# EAGLE board signal_processing_module (EAGLE 9.6.2)
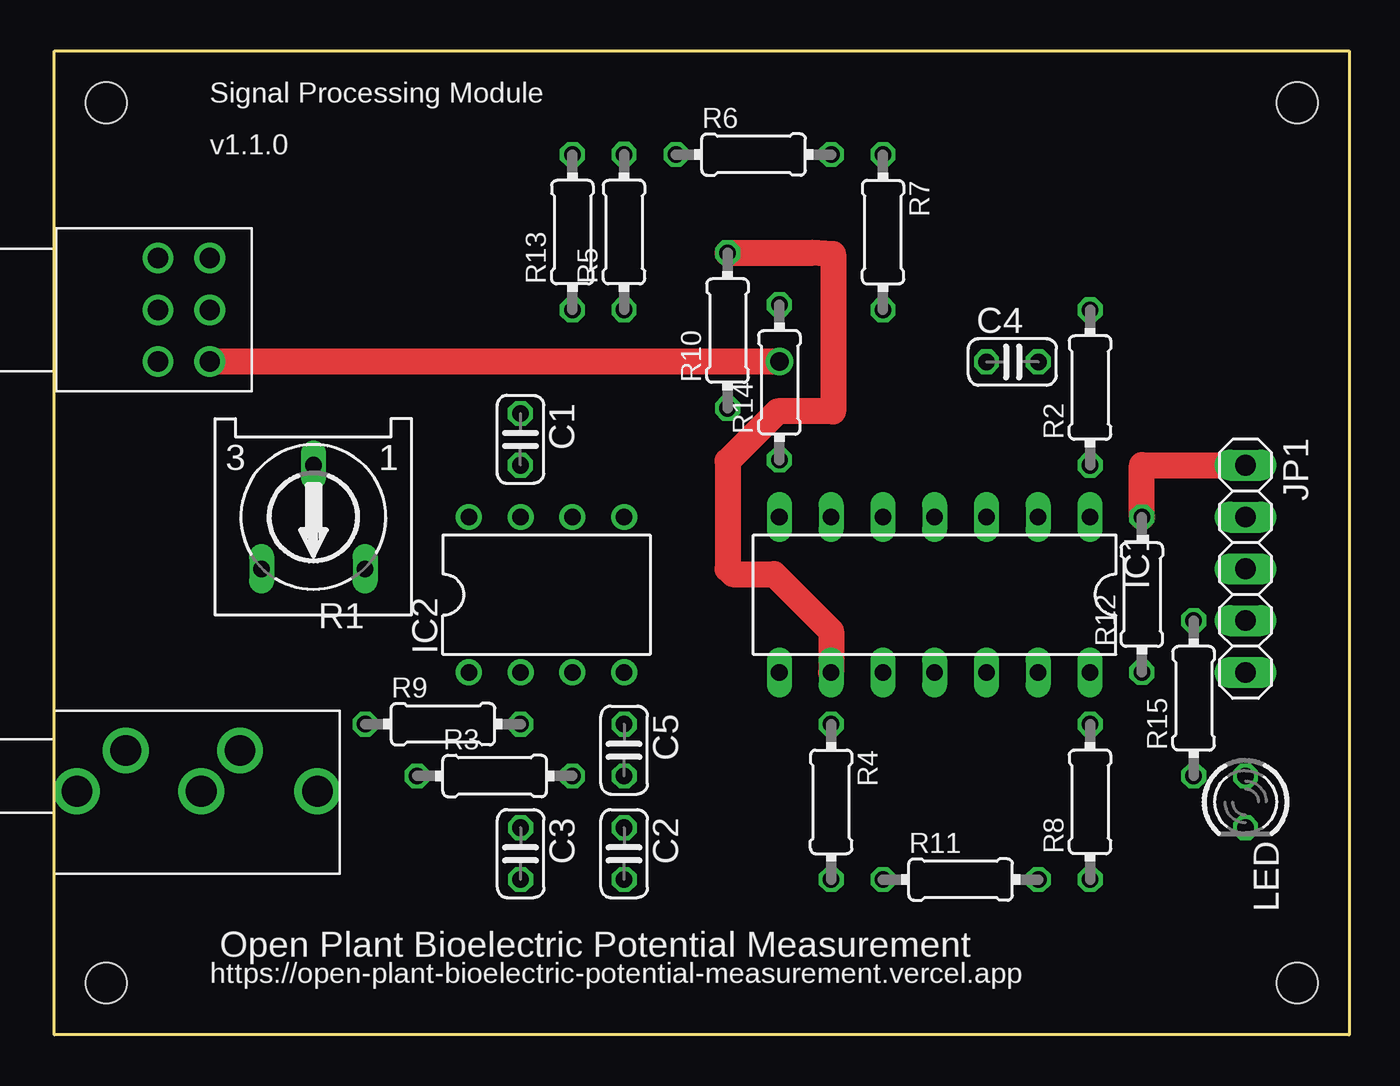
[diagram p0: board, top side]
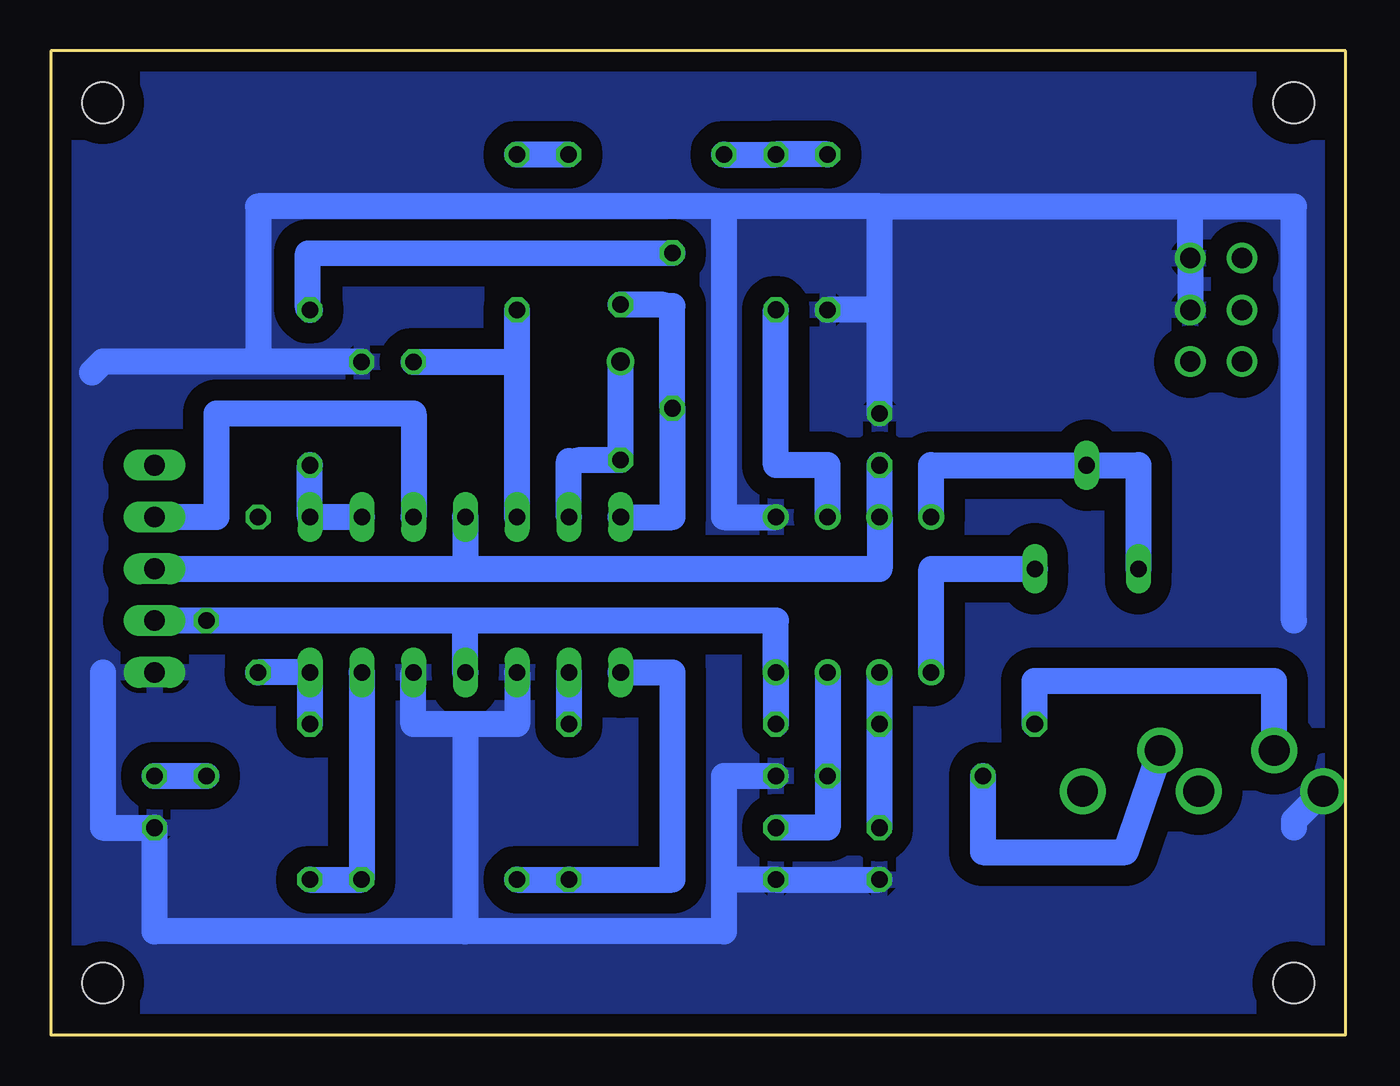
[diagram p1: board, bottom side, seen from below]

Size 63.5 x 48.26 mm. Coordinates in mm from the lower left corner, seen from the top.
Outline: 0,0 63.5,0 63.5,48.26 0,48.26 0,0
Copper layers (1*16): Top 0.035mm / dielectric 1.6mm / Bottom 0.035mm
Design rules "Elecrow_2-layer_PCB_eagle_rule": minimum track width 6mil, minimum drill 12mil, track to track 6mil, track to pad 6mil, pad to pad 6mil, via to via 8mil, smd to smd 0mil, copper to edge 20mil, drill to drill 10mil, minimum pad ring 6mil, minimum via ring 6mil, stop-mask expansion 0mil, vias tented up to drill 100mil, thermal gap 10mil
Net classes: 0 default: width 1.27 mm, clearance 0.381 mm
Holes 2 mm at 2.54,45.72 2.54,2.54 60.96,2.54 60.96,45.72
Milling: area 0,0 to 63.5,48.3

## Footprints (pad centres in the part's own frame; a part is rotated, then mirrored left to right if it is on the bottom)
C025-024X044 = drill 0.813 octagon: 1 -1.27,0; 2 1.27,0
DIL14 = drill 0.813 long: 1 -7.62,-3.81; 2 -5.08,-3.81; 3 -2.54,-3.81; 4 0,-3.81; 5 2.54,-3.81; 6 5.08,-3.81; 7 7.62,-3.81; 8 7.62,3.81; 9 5.08,3.81; 10 2.54,3.81; 11 0,3.81; 12 -2.54,3.81; 13 -5.08,3.81; 14 -7.62,3.81
DIL08 = drill 0.813 pad 1.27: 1 -3.81,-3.81; 2 -1.27,-3.81; 3 1.27,-3.81; 4 3.81,-3.81; 5 3.81,3.81; 6 1.27,3.81; 7 -1.27,3.81; 8 -3.81,3.81
1X05 = drill 1.016 long: 1 -5.08,0; 2 -2.54,0; 3 0,0; 4 2.54,0; 5 5.08,0
LED3MM = drill 0.813 octagon: A -1.27,0; K 1.27,0
RS3 = drill 0.813 long: A -2.54,2.54; E 2.54,2.54; S 0,-2.54
0204/7 = drill 0.813 octagon: 1 -3.81,0; 2 3.81,0
2CH_VR = drill 1: P$1 0,0; P$2 0,2.54; P$3 0,-2.54; P$4 -2.54,-2.54; P$5 -2.54,0; P$6 -2.54,2.54
MJ-354W-SG = drill 1.5: P$1 -1.1,0.75; P$2 -3.5,-1.25; P$3 -7.2,0.75; P$4 -9.1,-1.25; P$5 -12.9,0.75

## Placement (x,y rotation side)
C1  0.1u  [C025-024X044]  22.85,29.21 270 top
C2  47p  [C025-024X044]  27.95,8.89 270 top
C3  47p  [C025-024X044]  22.87,8.89 270 top
C4  0.1u  [C025-024X044]  46.99,33.01 0 top
C5  0.1u  [C025-024X044]  27.95,13.97 270 top
IC1  LM324N  [DIL14]  43.17,21.59 180 top
IC2  TL061P  [DIL08]  24.14,21.59 0 top
JP1  [1X05]  58.42,22.86 270 top
LED  [LED3MM]  58.42,11.43 270 top
R1  50k  [RS3]  12.7,25.4 180 top
R2  10k  [0204/7]  50.8,31.75 90 top
R3  1k  [0204/7]  21.6,12.7 0 top
R4  10k  [0204/7]  38.1,11.43 270 top
R5  10k  [0204/7]  27.94,39.38 90 top
R6  100k  [0204/7]  34.3,43.18 0 top
R7  68k  [0204/7]  40.64,39.37 270 top
R8  10k  [0204/7]  50.8,11.43 90 top
R9  1k  [0204/7]  19.06,15.24 0 top
R10  10k  [0204/7]  33.02,34.54 90 top
R11  10k  [0204/7]  44.45,7.62 0 top
R12  1k  [0204/7]  53.34,21.59 90 top
R13  10k  [0204/7]  25.41,39.37 90 top
R14  100k  [0204/7]  35.56,32 90 top
R15  4.7k  [0204/7]  55.88,16.51 90 top
R16  50k  [2CH_VR]  5.08,35.56 180 top
U$1  [MJ-354W-SG]  0,12.7 180 top

## Library data of the parts
C1-C5 = rcl; SPICEPREFIX: C
IC1 IC2 = linear
JP1 = pinhead
LED = led
R1 = pot
R2-R15 = rcl; SPICEPREFIX: R
R16 U$1 = myparts

## Nets
+5V: C1.2 IC1.4 IC2.7 JP1.3
-5V: C5.1 IC1.11 IC2.4 JP1.4 R15.2
GND: C1.1 C2.2 C3.2 C4.2 C5.2 IC1.10 IC1.12 IC2.5 JP1.5 LED.K R13.1 R16.P$4 R16.P$5 U$1.P$1
N$1: R9.1 U$1.P$2
N$2: R3.1 U$1.P$4
N$3: C2.1 IC2.3 R3.2
N$4: C3.1 IC2.2 R9.2
N$5: IC2.8 R1.E R1.S
N$6: IC2.6 R5.1
N$7: IC2.1 R1.A
N$8: R6.2 R7.1
N$9: IC1.13 R8.1 R11.2
N$10: JP1.1 R12.2
N$11: LED.A R15.1
N$12: IC1.6 R14.1 R16.P$6
N$13: IC1.8 R4.2 R11.1
N$14: IC1.14 R8.2 R12.1
N$15: C4.1 IC1.5 R7.2
N$17: R5.2 R6.1 R13.2
N$18: IC1.1 IC1.2 R2.1
N$21: IC1.9 R2.2 R4.1 R10.2
RAW_SIGNAL: IC1.7 R10.1 R14.2
VCC: IC1.3 JP1.2

## Tracks (layer width: path | path; a pad name or v marks a point on that pad's centre or on a via)
+5V
  Bottom 1.27: JP1.3 43.18,22.86 | 43.18,22.86 22.86,22.86 IC2.7 22.85,25.41 C1.2 | IC1.4 43.18,22.86
-5V
  Bottom 1.27: 43.18,20.32 27.94,20.32 27.94,20.31 27.95,20.31 IC2.4 C5.1 | 43.18,20.32 R15.2 JP1.4 | IC1.11 43.18,20.32
GND
  Bottom 1.27: C1.1 22.86,35.56 | 22.86,35.56 22.86,40.64 | 60.96,17.78 60.96,10.16 LED.K 58.42,5.08 43.18,5.08 | C3.2 C2.2 30.48,7.62 | 30.48,7.62 30.48,12.7 C5.2 | 2.54,20.32 2.54,40.64 7.62,40.64 | 22.86,40.64 7.62,40.64 | 7.62,40.64 R16.P$4 R16.P$5 | 30.48,7.62 30.48,5.08 43.18,5.08 | 43.18,15.24 45.72,15.24 IC1.12 | 22.86,35.56 R13.1 | 22.86,40.64 30.48,40.64 | IC2.5 30.48,25.4 30.48,40.64 | 43.18,15.24 43.18,5.08 | C4.2 53.34,33.02 | 53.34,33.02 60.96,33.02 61.49,32.49 | 30.48,40.64 53.34,40.64 53.34,33.02 | IC1.10 40.64,15.24 43.18,15.24 | 2.54,10.16 2.54,10.51 U$1.P$1
  pour Bottom (isolate 1.016): 0,48.26 0,0 63.5,0 63.5,48.26
N$1
  Bottom 1.27: U$1.P$2 3.5,17.35 15.25,17.35 R9.1
N$2
  Bottom 1.27: R3.1 17.79,8.96 10.8,8.96 U$1.P$4
N$3
  Bottom 1.27: IC2.3 R3.2 25.41,10.17 25.4,10.16 C2.1
N$4
  Bottom 1.27: IC2.2 R9.2 C3.1
N$5
  Bottom 1.27: IC2.8 20.33,27.94 R1.S 10.16,27.94 R1.E
N$6
  Bottom 1.27: IC2.6 25.4,27.94 27.94,27.94 R5.1
N$7
  Bottom 1.27: IC2.1 20.32,22.86 R1.A
N$8
  Bottom 1.27: R6.2 R7.1
N$9
  Bottom 1.27: R8.1 R11.2 IC1.13
N$10
  Top 1.27: R12.2 53.34,27.94 JP1.1
N$11
  Bottom 1.27: LED.A R15.1
N$12  (via drill 0.9)
  Top 1.27: v35.56,33.02 R16.P$6
  Bottom 1.27: IC1.6 38.09,28.14 37.55,28.19 R14.1 v35.56,33.02
N$13
  Bottom 1.27: R11.1 R4.2 33.02,7.62 33.02,17.78 IC1.8
N$14
  Bottom 1.27: R8.2 IC1.14 R12.1
N$15
  Bottom 1.27: C4.1 40.65,33.01 | 40.65,33.01 40.64,33.02 R7.2 | IC1.5 40.63,33 40.65,33.01
N$17
  Bottom 1.27: R13.2 R5.2 R6.1
N$18
  Bottom 1.27: IC1.2 IC1.1 R2.1
N$21
  Top 1.27: IC1.9 38.09,19.8 35.3,22.6 33.28,22.6 33.02,22.86 33.02,28.14 35.47,30.59 38.2,30.59 38.2,38.3 37.12,38.35 R10.2
  Bottom 1.27: IC1.9 R4.1 | R2.2 50.9,35.66 50.9,38.33 R10.2
RAW_SIGNAL
  Bottom 1.27: IC1.7 33.02,25.4 R10.1 33.02,35.76 33.56,35.81 R14.2
VCC
  Bottom 1.27: JP1.2 55.37,25.4 55.37,30.48 45.72,30.48 45.71,30.47 IC1.3

## Text on the board
tPlace: Signal Processing Module | v1.1.0 | Open Plant Bioelectric Potential Measurement | https://open-plant-bioelectric-potential-measurement.vercel.app